# Allegro board 2019-09-22.brd
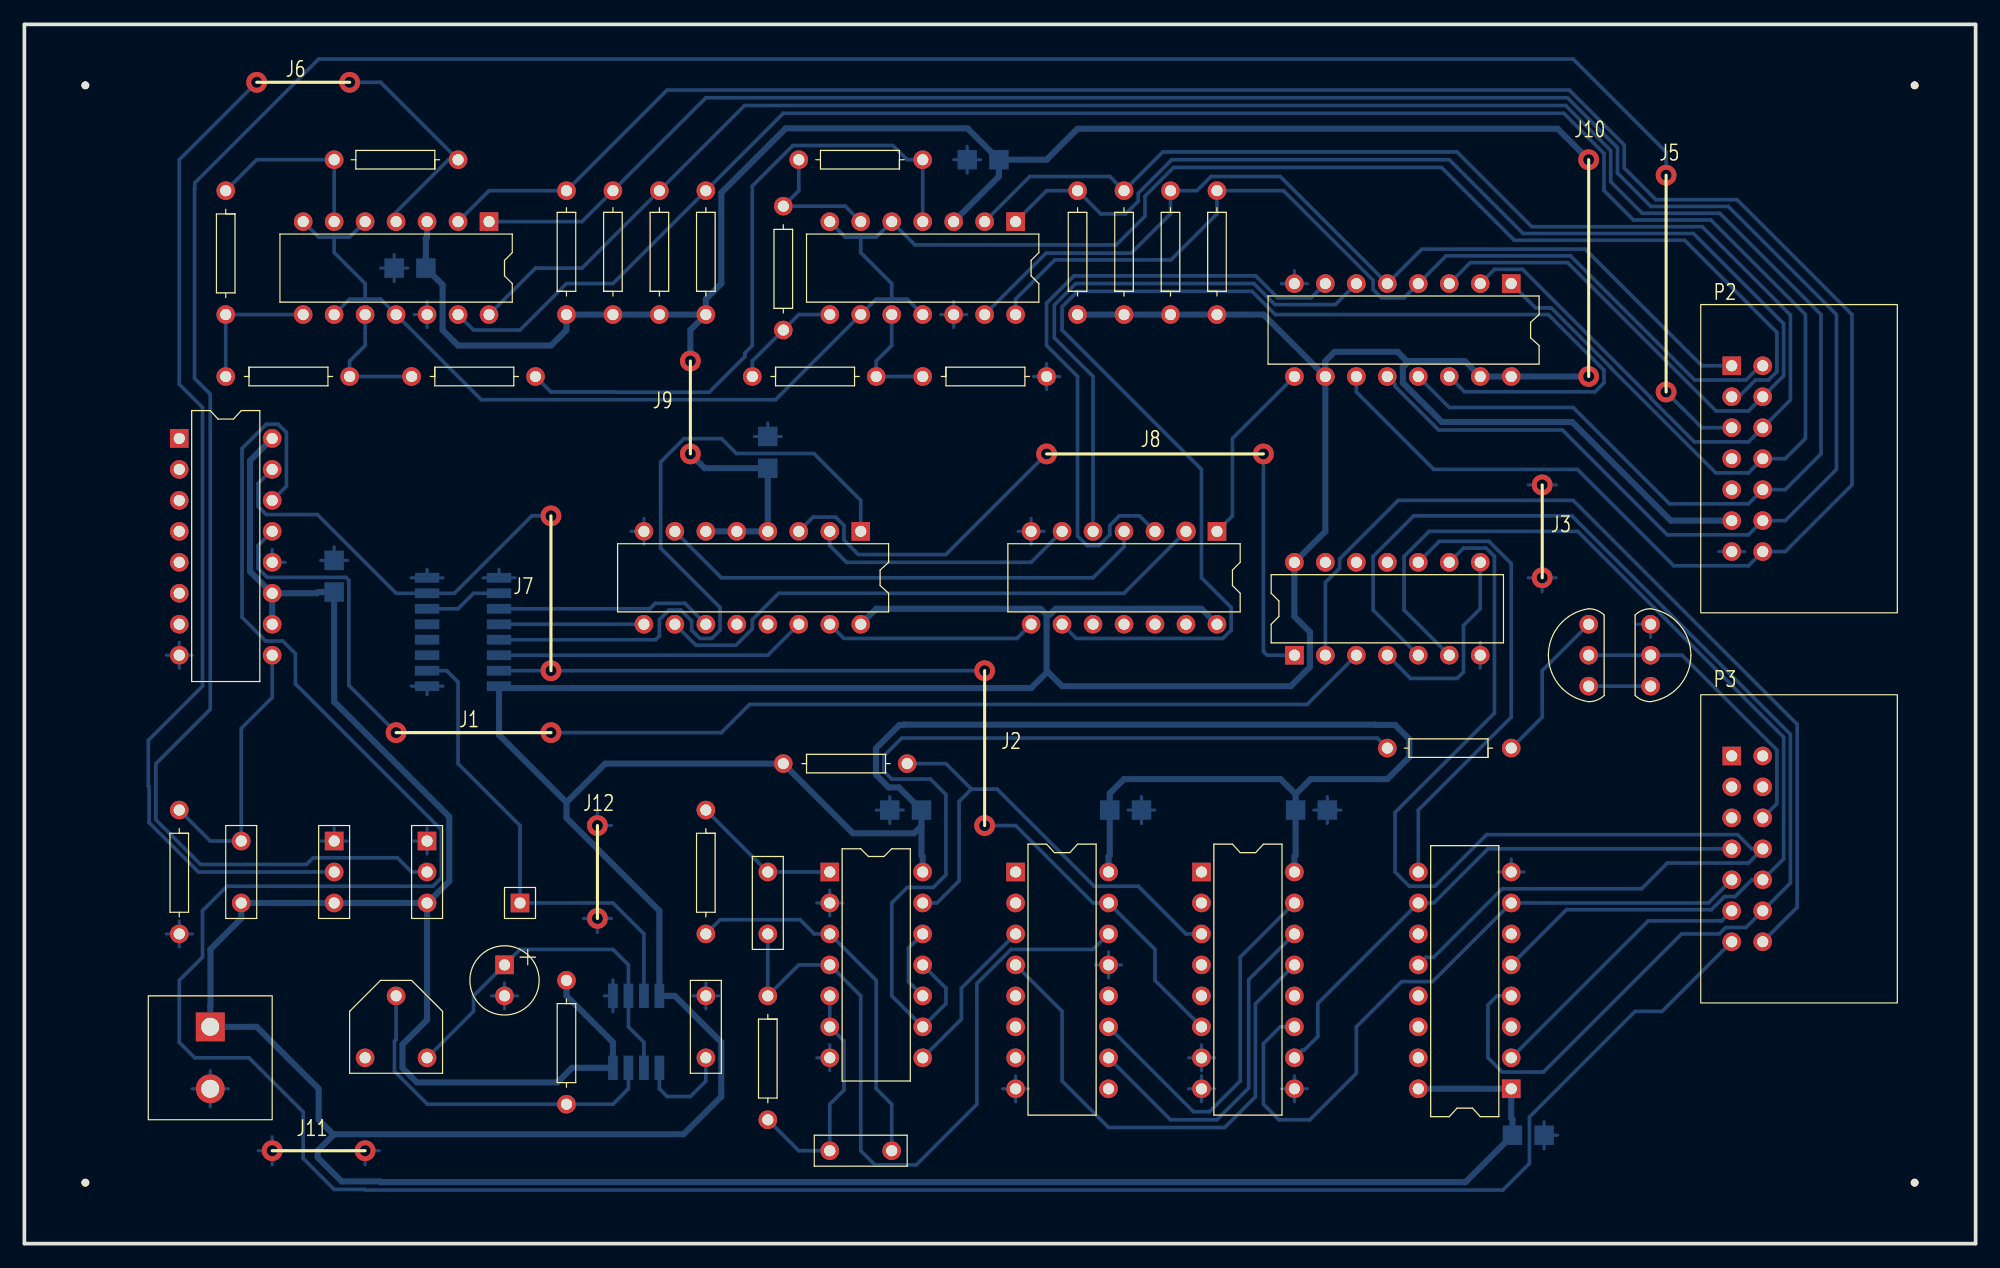
[diagram p0: board, top side]
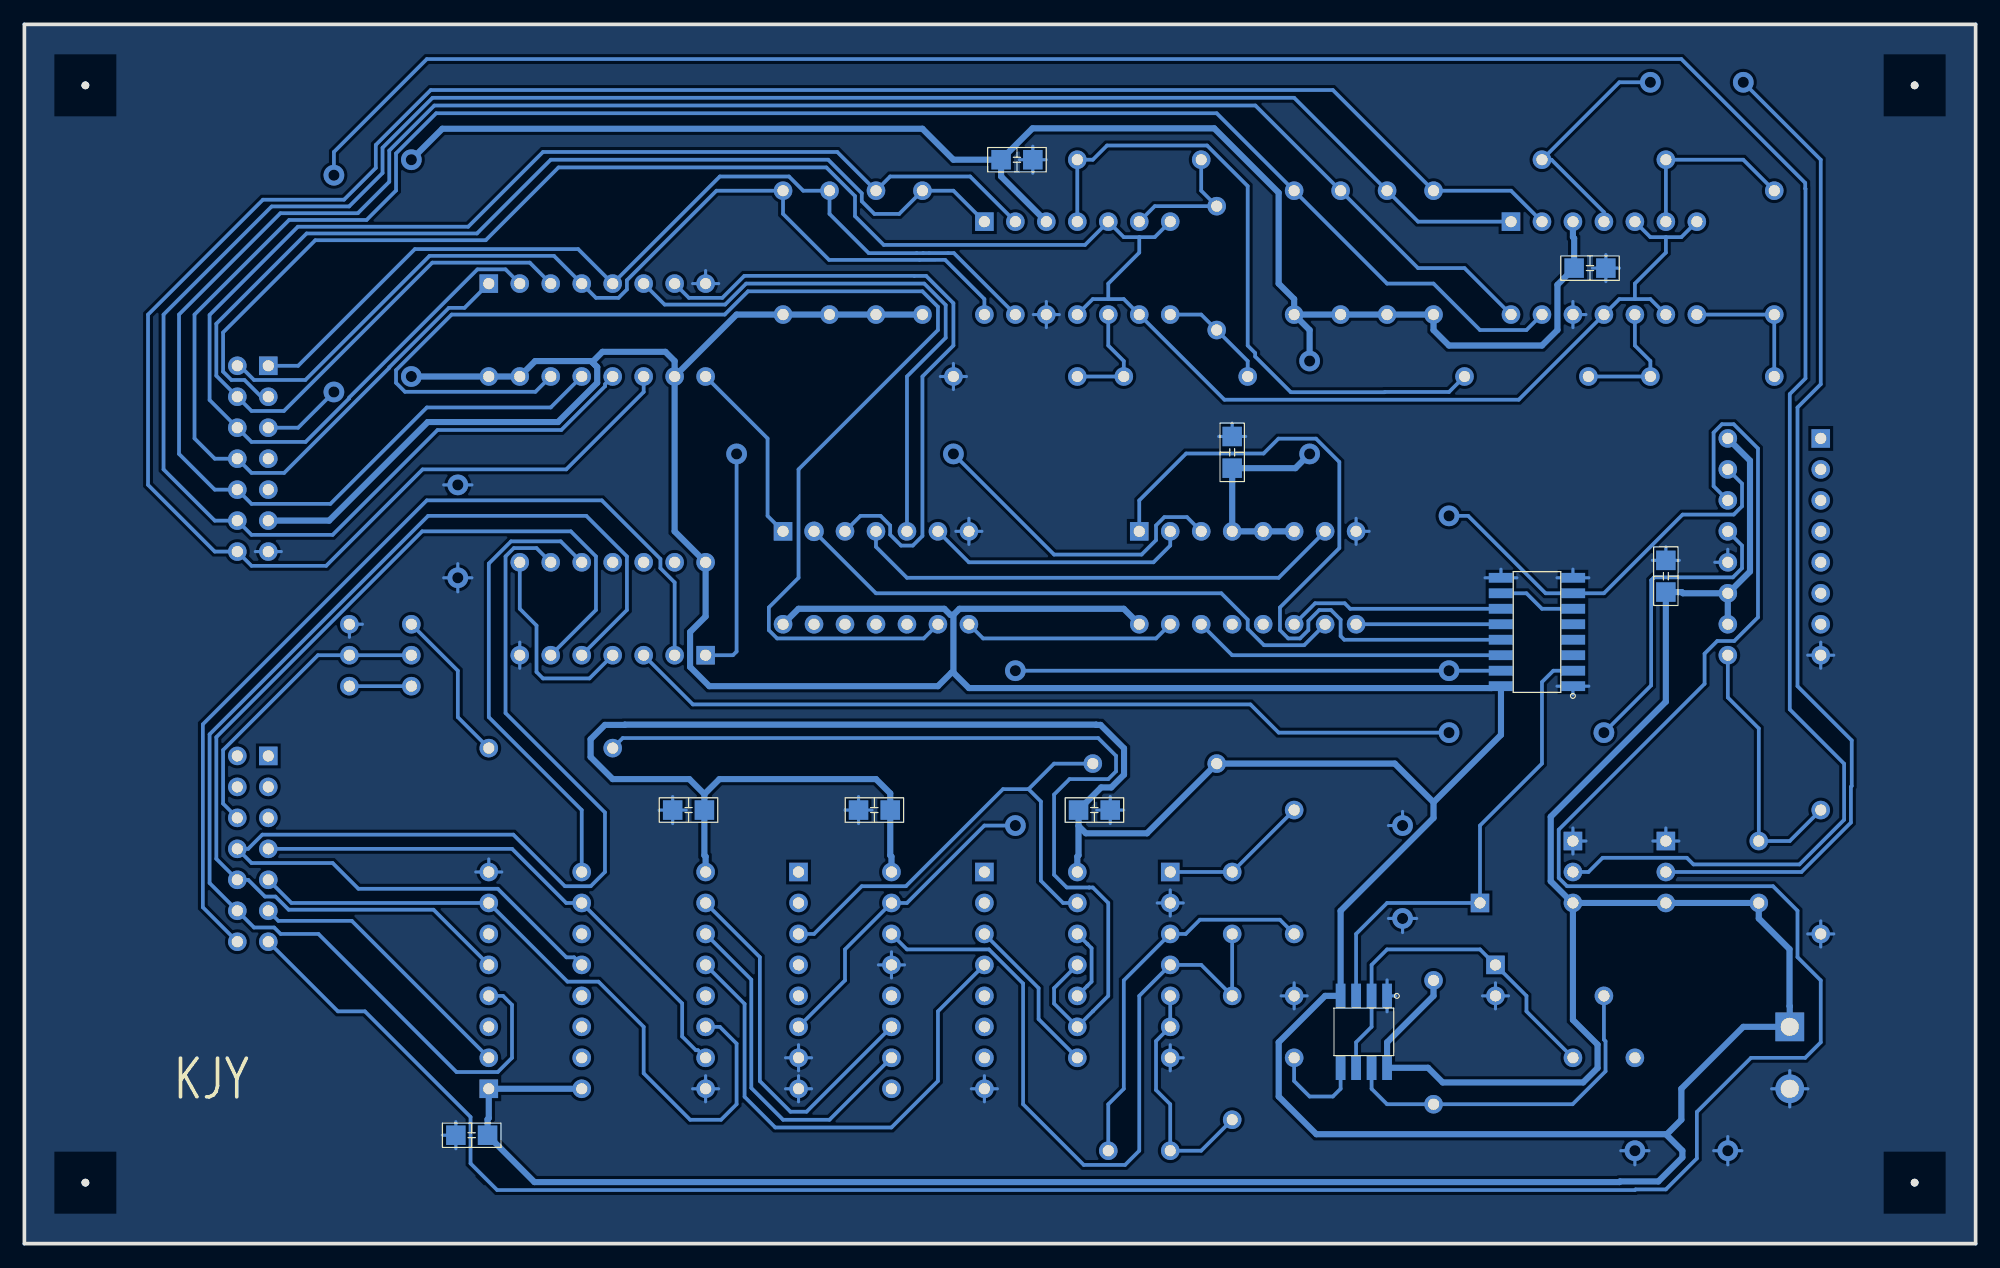
[diagram p1: board, bottom side, seen from below]

Outline 160 x 100 mm; copper layers: TOP, BOTTOM. Coordinates in mm from the lower left corner of the outline.
Outline path: 0,100 0,0 160,0 160,100 0,100

## Design rules (mm)
nets with their own width: min track width 0.5; nets +5V GND

## Placement (name value [footprint] x y rotation side)
C1  10uF  [CAP196]  39.37 22.86 0 top
C2  0.1uF  [CAP300]  55.88 15.24 90 top
C3  0.1uF  [CAP300]  17.78 27.94 90 top
C4  0.01uF  [CAP300]  60.96 30.48 270 top
C5  0.01uF  [CAP300]  71.12 7.62 180 top
C6  0.1uF  [SMDCAP]  33.02 80.01 180 bottom
C7  0.1uF  [SMDCAP]  80.01 88.9 180 bottom
C8  0.1uF  [SMDCAP]  60.96 63.5 90 bottom
C9  0.1uF  [SMDCAP]  25.4 53.34 90 bottom
C10  0.1uF  [SMDCAP]  73.66 35.56 180 bottom
C11  0.1uF  [SMDCAP]  88.9 35.56 0 bottom
C12  0.1uF  [SMDCAP]  104.14 35.56 0 bottom
C13  0.1uF  [SMDCAP]  121.92 8.89 0 bottom
J1  -  [JUMPER4]  30.48 41.91 180 bottom
J2  -  [JUMPER4]  78.74 46.99 90 bottom
J3  -  [JUMPER2]  124.46 54.61 270 bottom
J5  -  [JUMPER6]  134.62 69.85 270 bottom
J6  -  [JUMPER2]  19.05 95.25 180 bottom
J7  -  [JUMPER4]  43.18 46.99 270 bottom
J8  -  [JUMPER6]  101.6 64.77 0 bottom
J9  -  [JUMPER2]  54.61 64.77 270 bottom
J10  -  [JUMPER6]  128.27 71.12 270 bottom
J11  -  [JUMPER2]  27.94 7.62 0 bottom
J12  -  [JUMPER2]  46.99 26.67 270 bottom
NOREF  -  [unnamed]  155 95 0 top
NOREF#2  -  [#2]  0 0 0 top
NOREF#3  -  [unnamed]  5 95 0 top
NOREF#4  -  [#2]  0 0 90 top
NOREF#5  -  [unnamed]  5 5 0 top
NOREF#6  -  [unnamed]  155 5 0 top
P1  CON2  [POWER2]  15.24 17.78 270 top
P2  CON14  [JUMPER14]  140 72 270 top
P3  CON14  [JUMPER14]  140 40 270 top
Q1  2SC1815  [TO92]  128.27 45.72 90 top
Q2  2SC1815  [TO92]  133.35 50.8 270 top
R1  10K  [RES400]  44.45 21.59 180 top
R2  10K  [RES400]  35.56 88.9 90 top
R3  10K  [RES400]  16.51 86.36 180 top
R4  10K  [RES400]  16.51 71.12 270 top
R5  10K  [RES400]  31.75 71.12 270 top
R6  10K  [RES400]  73.66 88.9 90 top
R7  10K  [RES400]  62.23 85.09 180 top
R8  10K  [RES400]  59.69 71.12 270 top
R9  100  [RES400]  73.66 71.12 270 top
R10  4.7K  [RES400]  44.45 76.2 0 top
R11  4.7K  [RES400]  48.26 76.2 0 top
R12  4.7K  [RES400]  52.07 76.2 0 top
R13  4.7K  [RES400]  55.88 76.2 0 top
R14  4.7K  [RES400]  90.17 76.2 0 top
R15  4.7K  [RES400]  86.36 76.2 0 top
R16  4.7K  [RES400]  97.79 76.2 0 top
R17  4.7K  [RES400]  93.98 76.2 0 top
R18  680K  [RES400]  12.7 35.56 180 top
R19  10K  [RES400]  55.88 35.56 180 top
R20  10K  [RES400]  60.96 20.32 180 top
R21  10K  [RES400]  62.23 39.37 270 top
R22  1K  [RES400]  121.92 40.64 90 top
TP1  TP  [JUMPER1]  40.64 27.94 0 top
U1  NE555  [SOP8]  48.26 20.32 270 bottom
U2  LM339  [DIP14_3]  38.1 83.82 270 top
U3  LM339  [DIP14_3]  81.28 83.82 270 top
U4  40147  [DIP16_3]  121.92 78.74 270 top
U5  4069  [DIP14_3#2]  97.79 58.42 270 top
U6  4518  [SOP16]  33.02 45.72 0 bottom
U7  4585  [DIP16_3]  68.58 58.42 270 top
U8  4027  [DIP16_3]  12.7 66.04 0 top
U9  4071  [DIP14_3]  104.14 48.26 90 top
U10  4001  [DIP14_3]  66.04 30.48 0 top
U11  4017  [DIP16_3]  81.28 30.48 0 top
U12  4051  [DIP16_3]  96.52 30.48 0 top
U13  4175  [DIP16_3]  121.92 12.7 180 top
VR1  1M  [RESADJ]  33.02 15.24 270 top
VR2  10K  [JUMPER3]  25.4 33.02 270 top
VR3  10K  [JUMPER3]  33.02 33.02 270 top

## Library data of the parts
C1 = Cap Pol
C2-C5 = Cap NP: Tolerance: ***; User Part Number: ***
C6 = Cap TEXT_0
C7 = Cap TEXT_1
C8 = Cap TEXT_2
C9 = Cap TEXT_3
C10 = Cap TEXT_4
C11 = Cap TEXT_5
C12 = Cap TEXT_6
C13 = Cap TEXT_7
J1-J3 J5-J12 = JUMPER
P1 = CON2
P2 P3 = CON14: User Part Number: ***
Q1 Q2 = 2SC1815
R1-R22 = resistor: Tolerance: ***; User Part Number: ***
TP1 = TP: User Part Number: ***
U1 = NE555
U2 U3 = LM339: Tolerance: ***; User Part Number: ***
U4 = 40147: Tolerance: ***; User Part Number: ***
U5 = 4069: Tolerance: ***; User Part Number: ***
U6 = 4518
U7 = 4585: Tolerance: ***; User Part Number: ***
U8 = 4027_0: Tolerance: ***; User Part Number: ***
U9 = 4071: Tolerance: ***; User Part Number: ***
U10 = 4001: Tolerance: ***; User Part Number: ***
U11 = 4017: Tolerance: ***; User Part Number: ***
U12 = 4051: Tolerance: ***; User Part Number: ***
U13 = 4175: Tolerance: ***; User Part Number: ***
VR1 = VR1: Tolerance: ***; User Part Number: ***
VR2 VR3 = VR2: User Part Number: ***

## Footprints (pads in the part's own frame, mm; a bottom-side part is the same pattern mirrored in y, then rotated)
CAP196
  rect 1.524x1.524 hole 0.914: 1(0,0)
  round 1.524 hole 0.914: 2(0,-2.54)
CAP300
  round 1.524 hole 0.914: 1(0,0) 2(5.08,0)
DIP14_3
  rect 1.524x1.524 hole 0.914: 1(0,0)
  round 1.524 hole 0.914: 2(0,-2.54) 3(0,-5.08) 4(0,-7.62) 5(0,-10.16) 6(0,-12.7) 7(0,-15.24) 8(7.62,-15.24) 9(7.62,-12.7) 10(7.62,-10.16) 11(7.62,-7.62) 12(7.62,-5.08) 13(7.62,-2.54) 14(7.62,0)
DIP14_3#2
  rect 1.524x1.524 hole 0.914: 1(0,0)
  round 1.6 hole 0.91: 2(0,-2.54)
  round 1.524 hole 0.914: 3(0,-5.08) 4(0,-7.62) 5(0,-10.16) 6(0,-12.7) 7(0,-15.24) 8(7.62,-15.24) 9(7.62,-12.7) 10(7.62,-10.16) 11(7.62,-7.62) 12(7.62,-5.08) 13(7.62,-2.54) 14(7.62,0)
DIP16_3
  rect 1.524x1.524 hole 0.914: 1(0,0)
  round 1.524 hole 0.914: 2(0,-2.54) 3(0,-5.08) 4(0,-7.62) 5(0,-10.16) 6(0,-12.7) 7(0,-15.24) 8(0,-17.78) 9(7.62,-17.78) 10(7.62,-15.24) 11(7.62,-12.7) 12(7.62,-10.16) 13(7.62,-7.62) 14(7.62,-5.08) 15(7.62,-2.54) 16(7.62,0)
JUMPER1
  rect 1.524x1.524 hole 0.914: 1(0,0)
JUMPER3
  rect 1.524x1.524 hole 0.914: 1(0,0)
  round 1.524 hole 0.914: 2(2.54,0) 3(5.08,0)
JUMPER14
  rect 1.524x1.524 hole 0.914: 1(0,0)
  round 1.524 hole 0.914: 2(0,2.54) 3(2.54,0) 4(2.54,2.54) 5(5.08,0) 6(5.08,2.54) 7(7.62,0) 8(7.62,2.54) 9(10.16,0) 10(10.16,2.54) 11(12.7,0) 12(12.7,2.54) 13(15.24,0) 14(15.24,2.54)
POWER2
  rect 2.362x2.362 hole 1.473: 1(0,0)
  round 2.362 hole 1.473: 2(5.08,0)
RES400
  round 1.524 hole 0.914: 1(0,0) 2(0,10.16)
RESADJ
  round 1.524 hole 0.914: 1(0,0) 2(-5.08,-2.54) 3(0,-5.08)
SMDCAP
  rect 1.6x1.6 smd: 1(0.1,0) 2(2.7,0)
SOP8
  rect 2x0.8 smd: 1(0,0) 2(0,-1.27) 3(0,-2.54) 4(0,-3.81) 5(5.9,-3.81) 6(5.9,-2.54) 7(5.9,-1.27) 8(5.9,0)
SOP16
  rect 2x0.8 smd: 1(0,0) 2(0,-1.27) 3(0,-2.54) 4(0,-3.81) 5(0,-5.08) 6(0,-6.35) 7(0,-7.62) 8(0,-8.89) 9(5.9,-8.89) 10(5.9,-7.62) 11(5.9,-6.35) 12(5.9,-5.08) 13(5.9,-3.81) 14(5.9,-2.54) 15(5.9,-1.27) 16(5.9,0)
TO92
  round 1.524 hole 0.914: 1(0,0) 2(2.54,0) 3(5.08,0)
unnamed
  round 0.635 hole 3 unplated: (0,0)

## Nets
+5V: C3.1 C6.1 C7.1 C8.1 C9.1 C10.1 C11.1 C12.1 C13.1 P1.1 P2.11 R1.1 R10.1 R11.1 R12.1 R13.1 R14.1 R15.1 R16.1 R17.1 R21.1 U1.4(RST) U1.8(VCC) U2.3 U3.3 U4.10(I\9\) U4.15(I\0\) U4.16(VCC) U5.14 U6.16 U7.4(A>BIN) U7.5(A<BIN) U7.6(A=BIN) U7.16(VCC) U8.10(J) U8.11(K) U8.16 U9.14 U10.14 U11.16(VCC) U12.16(VCC) U13.1(R\S\T\) U13.16(VCC) VR2.3(A) VR3.3(A)
GND: C1.2 C2.2 C6.2 C7.2 C8.2 C9.2 C10.2 C11.2 C12.2 C13.2 P1.2 P2.13 Q2.1(B) R9.2 R18.2 U1.1(GND) U2.12 U3.12 U4.8(GND) U5.7 U6.1(CLK) U6.8 U6.9(CLK) U7.8(GND) U8.8 U8.12(RST) U9.7 U10.2(I1) U10.7 U11.8(GND) U11.13(C\K\E\N\) U12.7(VEE) U12.8(GND) U12.9(C) U13.8(GND) VR2.1(WIPER) VR3.1(WIPER)
AD0: P2.14 R10.2 U2.2(OUT) U4.11(I\1\)
AD1: P2.12 R11.2 U2.1(OUT) U4.12(I\2\)
AD2: P2.10 R12.2 U2.14(OUT) U4.13(I\3\)
AD3: P2.8 R13.2 U2.13(OUT) U4.1(I\4\)
AD4: P2.6 R14.2 U3.2(OUT) U4.2(I\5\)
AD5: P2.4 R15.2 U3.1(OUT) U4.3(I\6\)
AD6: P2.2 R16.2 U3.14(OUT) U4.4(I\7\)
AD7: P2.1 R17.2 U3.13(OUT) U4.5(I\8\)
CLK: TP1.1 U1.3(OUT) U6.2(EN)
MOTOR-GND: P3.6 Q1.2(C) Q2.2(C)
MR: U6.7(CLR) U6.15(CLR) U8.15(Q) U11.15(RST) U12.6(E\N\)
MR2: P3.13 U8.14(Q\)
SW1: P3.14 U9.2(I1)
SW2: P3.12 U9.5(I0) U13.4(D0)
SW3: P3.10 U9.6(I1) U13.5(D1)
SW4: P3.8 U9.9(I1) U13.12(D2)
SWLED1: P3.11 U13.2(Q0)
SWLED2: P3.9 U12.11(A) U13.7(Q1)
SWLED3: P3.7 U12.10(B) U13.10(Q2)
VR3: P2.5 VR3.2(B)
VR-LED: P2.3 U2.5(+IN) U2.7(+IN) U2.9(+IN) U2.11(+IN) U3.5(+IN) U3.7(+IN) U3.9(+IN) U3.11(+IN)
N01111: R2.2 R3.1 U2.6(-IN)
N01115: R2.1 U2.4(-IN) VR2.2(B)
N01154: R3.2 R4.1 U2.8(-IN)
N01241: R4.2 R5.1 U2.10(-IN)
N01315: R5.2 R6.1 U3.4(-IN)
N01389: R6.2 R7.1 U3.6(-IN)
N01463: R7.2 R8.1 U3.8(-IN)
N01537: R8.2 R9.1 U3.10(-IN)
N03199: U4.9(A\) U5.1(I)
N03203: U4.7(B\) U5.3(I)
N03218: U4.6(C\) U5.5(I)
N03230: U4.14(D\) U5.9(I)
N03242: U5.8(O) U7.15(A3)
N03249: U5.6(O) U7.2(A2)
N03261: U5.4(O) U7.7(A1)
N03273: U5.2(O) U7.10(A0)
N03297: U6.11(Q0) U7.11(B0)
N03299: U6.12(Q1) U7.9(B1)
N03301: U6.13(Q2) U7.1(B2)
N03303: U6.14(Q3) U7.14(B3)
N03321: U6.6(Q3) U6.10(EN)
N03552: C3.2 R18.1 U8.9(SET)
N03574: U7.3(A=BOUT) U9.1(I0)
N03611: R1.2 U1.7(DISC) VR1.2
N03615: C1.1 U1.2(TRIG) U1.6(THR) VR1.1
N03657: C2.1 U1.5(CV)
N03771: U8.13(CLK) U9.3(O)
N13764: C5.1 R19.2 U10.3(O)
N13778: C5.2 R20.2 U10.5(I0) U10.6(I1)
N13892: C4.1 R19.1 U10.1(I0)
N13899: C4.2 R20.1 U10.4(O) U11.14(CLK)
N14066: U9.4(O) U9.8(I0)
N14070: U9.10(O) U13.9(CLK)
N14098: U10.8(I0) U11.3(0)
N14122: U11.4(2) U12.13(X0)
N14134: U11.10(4) U12.14(X1)
N14146: U11.11(9) U12.15(X2)
N14213: R21.2 U10.13(I1) U12.3(X)
N14272: U10.10(O) U10.12(I0)
N14287: R22.2 U10.9(I1) U10.11(O)
N14409: Q1.3(E) R22.1
N14422: Q1.1(B) Q2.3(E)

Pads without a net: P2 7 9; P3 1 2 3 4 5; U5 10 11 12 13; U6 3 4 5; U7 12 13; U8 1 2 3 4 5 6 7; U9 11 12 13; U11 1 2 5 6 7 9 12; U12 1 2 4 5 12; U13 3 6 11 13 14 15; VR1 3

## Via types
v1: diameter 1.7, hole 0.91, TOP to BOTTOM, 22 vias

## Routing (per net, layer and track width the routed paths; a pad name or vN(x,y) marks a point on that pad's centre or on a via; arc(x,y) is an arc through that point)
+5V: length 814.1
  BOTTOM w0.5: 44.45,36.2 47.62,39.37 R21.1 67.94,33.66 72.96,33.66 73.56,34.26 ; 44.45,36.2 44.45,34.91 52.07,27.3 U1.4 53.34,20.32 57.15,16.51 57.15,12.06 54.06,8.97 25.4,8.97 ; 44.45,36.2 38.92,41.73 U6.16 39.52,45.72 39.67,45.57 82.55,45.57 83.82,46.84 ; 73.56,34.26 C10.1 71.7,37.41 70.88,37.41 69.83,38.47 69.83,40.62 71.75,42.55 72.1,42.55 72.12,42.56 110.76,42.56 110.78,42.55 112.39,42.55 113.57,41.37 113.57,39.91 111.76,38.1 105.48,38.1 104.24,36.86 ; 73.56,34.26 73.56,31.85 73.66,31.75 U10.14 ; 113.03,71.89 113.03,70.6 116.24,67.39 126.92,67.39 135.01,59.3 P2.11 ; 113.03,71.89 113.53,72.39 118.11,72.39 U4.15 U4.16 v1(128.27,71.12) ; 113.03,71.89 113.44,72.3 112.59,73.14 107.44,73.14 106.68,72.39 U4.10 ; 83.82,51.57 83.82,46.84 ; 83.82,51.57 84.07,51.57 84.56,52.07 96.52,52.07 U5.14 ; 83.82,51.57 83.32,52.07 69.85,52.07 U7.16 ; 83.82,46.84 83.97,46.84 85.09,45.72 103.84,45.72 105.41,47.3 105.41,50.16 104.14,51.44 U9.14 106.68,58.42 U4.10 ; R13.1 R12.1 R11.1 R10.1 44.45,74.93 43.18,73.66 35.56,73.66 34.29,74.93 34.29,78.64 C6.1 32.92,82.45 33.02,82.55 U2.3 ; R13.1 54.61,74.93 v1(54.61,72.39) ; R13.1 55.88,77.47 57.15,78.74 57.15,86.19 62.43,91.47 77.34,91.47 C7.1 ; U4.10 101.6,76.2 R16.1 R17.1 R14.1 R15.1 ; VR3.3 33.02,18.35 31,16.33 31,14.4 32.18,13.22 43.7,13.22 44.9,14.42 U1.8 48.26,16.51 44.45,20.32 R1.1 ; VR3.3 33.05,27.94 34.84,29.73 34.84,35.01 25.4,44.45 C9.1 24.1,53.44 24,53.34 U8.11 ; VR3.3 VR2.3 C3.1 17.78,26.67 15.26,24.15 15.26,19.48 15.24,19.46 P1.1 19.05,17.78 24.13,12.7 24.13,10.16 25.32,8.97 25.4,8.97 ; 25.4,8.97 24.05,7.62 24.05,7.07 26.02,5.1 29.16,5.1 29.21,5.05 118.18,5.05 C13.1 122.02,10.19 121.92,10.29 U13.1 U13.16 ; v1(128.27,88.9) 125.73,91.44 86.36,91.44 83.82,88.9 C7.1 ; v1(54.61,64.77) 55.78,63.6 C8.1 U7.4 U7.5 U7.6 ; U3.3 79.91,87.53 C7.1 ; U8.16 18.5,64.22 18.5,55.13 20.29,53.34 U8.11 ; U12.16 104.14,31.75 104.24,31.85 C12.1 104.24,36.86 ; U8.11 U8.10 ; 104.24,36.86 103,38.1 90.17,38.1 89,36.93 C11.1 89,31.85 88.9,31.75 U11.16
GND: length 158.8
  BOTTOM w0.254: 96.52,11.63 U12.8 ; U12.8 97.59,12.7 ; U12.8 95.45,12.7 ; U12.8 96.52,13.77 ; R18.2 13.77,25.4 ; R18.2 11.63,25.4 ; R18.2 12.7,26.47 ; R18.2 12.7,24.33 ; 64.97,15.24 U10.7 ; U10.7 66.04,14.17 ; U10.7 66.04,16.31 ; 141.07,56.76 P2.13 138.93,56.76 ; U6.1 34.33,45.72 ; U6.1 33.02,45.01 ; U6.1 31.71,45.72 ; 54.81,20.32 C2.2 ; C2.2 55.88,21.39 ; C2.2 55.88,19.25 ; C2.2 56.95,20.32 ; 75.13,76.2 U3.12 ; U3.12 76.2,75.13 ; U3.12 76.2,77.27 ; U3.12 77.27,76.2 ; 50.8,57.35 U7.8 ; U7.8 50.8,59.49 ; U7.8 49.73,58.42 ; 82.75,71.12 R9.2 ; R9.2 83.82,70.05 ; R9.2 83.82,72.19 ; R9.2 84.89,71.12 ; 11.63,48.26 U8.8 ; U8.8 12.7,47.19 ; U8.8 12.7,49.33 ; U8.8 13.77,48.26 ; 13.75,12.7 P1.2 ; P1.2 16.73,12.7 ; P1.2 15.24,11.21 ; P1.2 15.24,14.19 ; C11.2 92.71,35.56 ; C11.2 91.6,34.45 ; C11.2 91.6,36.67 ; C11.2 90.49,35.56 ; 27.94,6.46 v1(27.94,7.62) ; v1(27.94,7.62) 29.1,7.62 ; v1(27.94,7.62) 26.78,7.62 ; U2.12 33.02,77.27 ; U2.12 31.95,76.2 ; U2.12 33.02,75.13 ; C13.2 124.62,10 ; C13.2 124.62,7.78 ; C13.2 125.73,8.89 ; 38.3,20.32 C1.2 ; C1.2 40.44,20.32 ; C1.2 39.37,19.25 ; C1.2 39.37,21.39 ; C6.2 30.32,81.12 ; C6.2 29.21,80.01 ; C6.2 30.32,78.9 ; C6.2 31.43,80.01 ; 24.33,33.02 VR2.1 ; VR2.1 25.4,34.09 ; VR2.1 26.47,33.02 ; 31.71,54.61 U6.8 ; U6.8 34.33,54.61 ; U6.8 33.02,55.32 ; 119.38,47.19 U9.7 119.38,49.33 ; 81.28,11.63 U11.8 ; U11.8 81.28,13.77 ; U11.8 82.35,12.7 ; U11.8 80.21,12.7 ; U13.8 121.92,31.55 ; U13.8 120.85,30.48 ; U13.8 122.99,30.48 ; 70.96,34.45 C10.2 ; C10.2 72.07,35.56 ; C10.2 70.96,36.67 ; C10.2 69.85,35.56 ; 88.9,21.79 U11.13 ; U11.13 89.97,22.86 ; U11.13 87.83,22.86 ; U11.13 88.9,23.93 ; 66.04,26.87 U10.2 ; U10.2 66.04,29.01 ; U10.2 67.11,27.94 ; U10.2 64.97,27.94 ; 95.45,15.24 U12.7 ; U12.7 97.59,15.24 ; U12.7 96.52,16.31 ; U12.7 96.52,14.17 ; 103.07,78.74 U4.8 ; U4.8 105.21,78.74 ; U4.8 104.14,79.81 ; C12.2 107.95,35.56 ; C12.2 105.73,35.56 ; C12.2 106.84,34.45 ; C12.2 106.84,36.67 ; v1(20.32,7.62) 21.48,7.62 ; v1(20.32,7.62) 19.16,7.62 ; v1(20.32,7.62) 20.32,6.46 ; v1(20.32,7.62) 20.32,8.78 ; 76.2,88.9 C7.2 ; C7.2 77.31,90.01 ; C7.2 78.42,88.9 ; C7.2 77.31,87.79 ; C8.2 62.07,66.2 ; C8.2 59.85,66.2 ; C8.2 60.96,67.31 ; v1(124.46,54.61) 125.62,54.61 ; v1(124.46,54.61) 124.46,55.77 ; v1(124.46,54.61) 124.46,53.45 ; v1(124.46,54.61) 123.3,54.61 ; VR3.1 33.02,34.09 ; VR3.1 33.02,31.95 ; VR3.1 31.95,33.02 ; 21.39,55.88 U8.12 20.32,56.95 ; U12.9 104.14,13.77 ; U12.9 104.14,11.63 ; U12.9 105.21,12.7 ; U12.9 103.07,12.7 ; 46.99,25.51 v1(46.99,26.67) ; v1(46.99,26.67) 45.83,26.67 ; v1(46.99,26.67) 48.15,26.67 ; U6.9 38.92,55.32 ; U6.9 37.61,54.61 ; U6.9 40.23,54.61 ; 48.26,19.01 U1.1 ; U1.1 48.26,21.63 ; U1.1 47.55,20.32 ; C9.2 25.4,57.15 ; C9.2 26.51,56.04 ; C9.2 24.29,56.04 ; 82.55,57.35 U5.7 ; U5.7 82.55,59.49 ; U5.7 83.62,58.42 ; U5.7 81.48,58.42 ; 48.15,34.29 v1(46.99,34.29) 46.99,35.45 ; 123.3,62.23 v1(124.46,62.23) 125.62,62.23 ; 133.35,49.73 Q2.1 132.28,50.8
AD0: length 192
  BOTTOM w0.3: U2.2 38.1,86.36 R10.2 52.7,94.61 126.68,94.61 131.19,90.11 131.19,88.22 133.79,85.62 140.44,85.62 149.86,76.2 149.86,62.23 144.39,56.76 P2.14 141.37,55.59 135.25,55.59 127.34,63.5 115.57,63.5 109.22,69.85 U4.11
AD1: length 180.5
  BOTTOM w0.3: U2.1 45.72,83.82 R11.2 55.88,93.98 126.53,93.98 130.63,89.88 130.63,87.81 133.37,85.07 139.72,85.07 148.59,76.2 148.59,63.5 144.39,59.3 P2.12 141.37,58.13 134.72,58.13 126.12,66.73 115.97,66.73 112.38,70.32 112.38,70.5 U4.12
AD2: length 175.4
  BOTTOM w0.3: U4.13 116.84,68.58 127,68.58 134.91,60.67 141.37,60.67 P2.10 144.39,61.84 147.32,64.77 147.32,76.2 139.01,84.51 132.66,84.51 130.08,87.09 130.08,89.65 126.38,93.34 59.05,93.34 R12.2 45.72,80.01 41.91,80.01 U2.14
AD3: length 168.9
  BOTTOM w0.3: U2.13 36.83,74.93 40.64,74.93 44.45,78.74 48.26,78.74 R13.2 62.23,92.71 126.23,92.71 129.52,89.42 129.52,86.38 131.94,83.96 138.29,83.96 146.05,76.2 146.05,66.04 144.39,64.38 P2.8 141.37,63.21 138.7,63.21 130.08,71.83 130.08,71.87 125.19,76.75 123.91,76.75 U4.1
AD4: length 115.2
  BOTTOM w0.3: U3.2 82.45,87.53 89,87.53 R14.2 93.34,89.53 117.47,89.53 123.6,83.41 137.58,83.41 144.81,76.17 144.81,69.19 P2.6 141.37,65.75 136.94,65.75 133.37,69.33 133.37,69.39 122.85,79.91 120.55,79.91 U4.2
AD5: length 111.3
  BOTTOM w0.3: U4.3 118.56,80.46 126.55,80.46 138.72,68.29 141.37,68.29 P2.4 144.26,71.18 144.26,75.45 136.86,82.85 122.89,82.85 116.84,88.9 94.09,88.9 91.34,86.15 91.34,85.49 90.3,84.45 88.27,84.45 R15.2 83.82,86.36 U3.1
AD6: length 77.5
  BOTTOM w0.3: U3.14 81.28,77.47 84.5,80.69 86.6,80.68 94.02,80.68 97.79,84.46 R16.2 103.25,86.36 110.59,79.02 110.59,78.26 111.28,77.57 113.13,77.57 U4.4 116.57,81.01 126.78,81.01 136.96,70.83 141.17,70.83 142.01,71.67 142.22,71.67 P2.2
AD7: length 75.8
  BOTTOM w0.3: U3.13 83.78,81.24 84.27,81.24 85.81,81.24 86.29,81.24 86.32,81.24 86.83,81.24 86.83,81.24 90.76,81.24 93.98,84.45 R17.2 96.14,86.36 97.31,87.53 102.97,87.53 U4.5 114.59,81.57 127.98,81.57 137.55,72 P2.1
CLK: length 39.4
  BOTTOM w0.3: U1.3 50.8,25.4 48.26,27.94 TP1.1 40.64,34.29 35.56,39.37 35.56,46.05 34.62,46.99 U6.2
MOTOR-GND: length 24.7
  BOTTOM w0.3: P3.6 143.71,36.09 143.71,40.48 135.93,48.26 Q2.2 Q1.2
MR: length 99
  BOTTOM w0.3: U8.15 19.15,62.33 19.15,60.48 19.84,59.79 24.03,59.79 30.48,53.34 U6.7 35.26,53.34 41.61,59.69 v1(43.18,59.69) ; v1(78.74,34.29) 81.28,34.29 87.63,27.94 U11.15 92.71,24.13 92.71,21.59 U12.6 ; U6.15 v1(43.18,46.99) v1(78.74,46.99)
MR2: length 231.1
  BOTTOM w0.3: P3.13 134.29,19.05 132.08,19.05 123.42,10.39 123.42,6.58 121.23,4.39 27.94,4.39 27.89,4.45 25.4,4.45 22.86,6.99 22.86,10.79 18.41,15.24 13.97,15.24 12.7,16.51 12.7,21.59 14.61,23.5 14.61,27.31 16.61,29.31 33.5,29.31 34.19,30 34.19,33.95 22.23,45.91 22.23,48.39 21.19,49.43 19.79,49.43 17.85,51.37 17.85,65.22 19.84,67.21 20.8,67.21 21.49,66.52 21.49,62.13 U8.14
SW1: length 74.5
  BOTTOM w0.3: U9.2 106.68,54.23 107.85,55.4 107.85,56.16 112.65,60.96 127,60.96 145.37,42.59 145.37,27.59 P3.14
SW2: length 103.1
  BOTTOM w0.3: U13.4 120.75,20.32 120.02,19.58 120.02,15.24 121.18,14.07 124.56,14.07 135.89,25.4 138.99,25.4 139.52,25.93 141.17,25.93 P3.12 144.81,29.57 144.81,41.77 126.89,59.69 113.92,59.69 110.59,56.36 110.59,51.97 U9.5
SW3: length 84.5
  BOTTOM w0.3: U13.5 126.45,27.39 138.33,27.39 139.41,28.47 140.28,28.47 141.65,29.84 P3.10 144.26,31.56 144.26,41.54 127.38,58.42 115.19,58.42 113.13,56.36 113.13,51.97 U9.6
SW4: length 98.8
  BOTTOM w0.3: U9.9 118.01,57.05 119.86,57.05 120.55,56.36 120.55,43.52 112.39,35.36 112.39,30.48 113.56,29.31 115.67,29.31 119.91,33.55 140.48,33.55 141.65,32.38 P3.8 141.37,31.21 134.72,31.21 132.61,29.11 121.18,29.11 115.56,23.48 114.92,23.48 U13.12
SWLED1: length 23.1
  BOTTOM w0.3: U13.2 133.16,26.48 139.18,26.48 P3.11
SWLED2: length 57.4
  BOTTOM w0.3: U12.11 102.97,17.78 101.6,16.41 101.6,11.43 102.87,10.16 105.41,10.16 109.22,13.97 109.22,17.78 112.92,21.49 115.47,21.49 U13.7 138.1,27.94 P3.9
SWLED3: length 44.6
  BOTTOM w0.3: U12.10 104.76,15.86 104.94,15.86 106.06,16.98 106.06,19.7 U13.10 115.57,27.94 120.01,32.38 P3.7
VR3: length 215.6
  BOTTOM w0.3: VR3.2 31.75,30.48 30.58,31.65 23.68,31.65 23.14,31.1 14.44,31.1 10.78,34.76 10.78,39.36 15.24,43.82 15.24,69.67 13.95,70.96 13.95,86.52 13.97,86.54 13.97,87 24.13,97.16 127,97.16 134.62,89.53 v1(134.62,87.63) ; P2.5 137.55,66.92 v1(134.62,69.85)
VR-LED: length 171
  BOTTOM w0.3: 68.58,82.55 69.85,82.55 U3.5 73.03,81.92 89.53,81.92 91.89,84.27 91.89,85.92 94.24,88.27 116.2,88.27 122.17,82.3 136.14,82.3 143.71,74.73 143.71,71.52 143.02,70.83 141.95,70.83 140.58,69.46 P2.3 ; 68.58,82.55 67.31,82.55 U3.7 ; 68.58,82.55 68.58,81.28 71.12,78.74 71.12,77.47 ; 71.12,77.47 72.39,77.47 U3.11 ; 71.12,77.47 69.85,77.47 U3.9 61.59,69.22 37.47,69.22 U2.11 29.21,77.47 27.94,77.47 ; 27.94,77.47 27.94,78.74 25.4,81.28 25.4,82.55 ; 27.94,77.47 26.67,77.47 U2.9 ; 25.4,82.55 24.13,82.55 U2.7 ; 25.4,82.55 26.67,82.55 U2.5
N01111: length 15
  BOTTOM w0.3: U2.6 R2.2 19.05,88.9 R3.1
N01115: length 102
  BOTTOM w0.3: v1(19.05,95.25) 12.7,88.9 12.7,70.48 14.61,68.58 14.61,45.72 10.16,41.27 10.16,37.53 10.23,37.47 10.23,34.53 14.28,30.48 VR2.2 ; v1(26.67,95.25) 29.21,95.25 R2.1 34.78,88.9 30.48,84.6 U2.4
N01154: length 11.4
  BOTTOM w0.3: R4.1 R3.2 U2.8
N01241: length 10.7
  BOTTOM w0.3: U2.10 27.94,73.66 26.67,72.39 R4.2 R5.1
N01315: length 54.1
  BOTTOM w0.3: U3.4 R6.1 72.39,88.9 71.22,90.07 63.02,90.07 59.69,86.74 59.69,73.66 59.07,73.04 59.07,72.75 56.15,69.83 48.45,69.83 48.44,69.85 43.18,69.85 R5.2
N01389: length 11.2
  BOTTOM w0.3: U3.6 67.31,85.09 R7.1 63.5,86.36 R6.2
N01463: length 9.2
  BOTTOM w0.3: R8.1 59.69,72.39 R7.2 63.5,76.2 U3.8
N01537: length 9.4
  BOTTOM w0.3: R9.1 R8.2 69.85,72.39 71.12,73.66 U3.10
N03199: length 15.3
  BOTTOM w0.3: U4.9 99.06,66.04 99.06,59.69 U5.1
N03203: length 53.8
  BOTTOM w0.3: U5.3 91.44,59.69 89.79,59.69 89,58.9 89,58.15 88.11,57.25 87.15,57.25 86.36,58.04 86.36,71.12 83.82,73.66 83.82,77.13 86.06,79.37 87.03,79.37 87.03,79.38 100.97,79.38 102.77,77.57 105.51,77.57 U4.7
N03218: length 46.8
  BOTTOM w0.3: U5.5 87.63,71.12 84.45,74.3 84.45,76.98 86.21,78.74 100.82,78.74 102.54,77.02 107.5,77.02 U4.6
N03230: length 109.1
  BOTTOM w0.3: U4.14 118.09,69.87 128.79,69.87 129.52,70.6 129.52,71.64 124.96,76.2 102.57,76.2 100.67,78.11 86.36,78.11 85.09,76.84 85.09,74.93 96.52,63.5 96.52,54.61 98.96,52.17 98.96,50.32 98.27,49.63 86.26,49.63 U5.9
N03242: length 17.5
  BOTTOM w0.3: U7.15 67.21,49.63 81.38,49.63 U5.8
N03249: length 21.8
  BOTTOM w0.3: U5.6 82.55,55.88 67.41,55.88 66.04,57.25 U7.2
N03261: length 40.7
  BOTTOM w0.3: U7.7 57.15,54.61 87.63,54.61 90.17,57.15 U5.4
N03273: length 46.9
  BOTTOM w0.3: U7.10 55.06,49.08 58.35,49.08 59.69,50.42 59.69,51.18 61.85,53.34 90.17,53.34 U5.2
N03297: length 17.9
  BOTTOM w0.3: U7.11 54.16,52.52 51.74,52.52 51.29,52.07 U6.11
N03299: length 11.9
  BOTTOM w0.3: U7.9 U6.12
N03301: length 59.3
  BOTTOM w0.3: U7.1 68.58,60.96 64.74,64.8 58.39,64.8 57.17,66.02 54.09,66.02 52.17,64.11 52.17,57.05 57.05,52.17 57.05,50.32 56.36,49.63 55.4,49.63 54.71,50.32 54.71,51.08 53.82,51.97 52.86,51.97 52.07,51.18 52.07,49.83 51.77,49.53 U6.13
N03303: length 25.6
  BOTTOM w0.3: U7.14 60.96,48.26 U6.14
N03321: length 6.4
  BOTTOM w0.3: U6.10 36.83,53.34 35.56,52.07 U6.6
N03552: length 22.4
  BOTTOM w0.3: R18.1 15.24,33.02 C3.2 17.78,42.26 20.32,44.8 U8.9
N03574: length 45.1
  BOTTOM w0.3: U7.3 64.67,59.59 66.52,59.59 67.21,58.9 67.21,57.7 68.39,56.52 75.56,56.52 v1(83.82,64.77) ; v1(101.6,64.77) 101.6,48.56 101.9,48.26 U9.1
N03611: length 28.8
  BOTTOM w0.3: VR1.2 30.48,16.73 30.35,16.6 30.35,14.13 33.05,11.43 R1.2 48.26,11.43 49.53,12.7 U1.7
N03615: length 30.4
  BOTTOM w0.3: VR1.1 36.83,19.05 36.83,20.32 C1.1 40.64,24.13 48.26,24.13 49.53,22.86 U1.2 49.53,17.78 50.8,16.51 U1.6
N03657: length 8.2
  BOTTOM w0.3: U1.5 52.07,12.7 52.7,12.06 54.61,12.06 55.88,13.33 C2.1
N03771: length 94.1
  BOTTOM w0.3: U8.13 19.15,57.25 19.15,55.4 19.91,54.64 26.37,54.64 26.6,54.41 26.6,45.79 v1(30.48,41.91) ; U9.3 105.18,44.22 59.46,44.22 57.15,41.91 v1(43.18,41.91)
N13764: length 31
  BOTTOM w0.3: C5.1 71.12,11.43 69.85,12.7 69.85,21.59 U10.3 64.77,25.4 63.6,26.57 57.05,26.57 R19.2
N13778: length 19.8
  BOTTOM w0.3: U10.5 U10.6 67.21,16.61 67.21,12.6 66.04,11.43 C5.2 63.5,7.62 R20.2
N13892: length 12.3
  BOTTOM w0.3: U10.1 C4.1 R19.1
N13899: length 62
  BOTTOM w0.3: C4.2 R20.1 63.5,22.86 U10.4 68.58,20.32 68.58,7.62 69.75,6.45 73.13,6.45 78.11,11.43 78.11,21.33 80.9,24.13 87.63,24.13 U11.14
N14066: length 16.8
  BOTTOM w0.3: U9.8 119.38,52.07 118.01,50.7 118.01,46.88 117.48,46.35 113.67,46.35 U9.4
N14070: length 37.5
  BOTTOM w0.3: U13.9 114.3,35.56 121.92,43.18 121.92,55.77 120.09,57.6 116.02,57.6 U9.10
N14098: length 13.3
  BOTTOM w0.3: U10.8 76.83,18.41 76.83,20.95 U11.3
N14122: length 41.7
  BOTTOM w0.3: U12.13 100.95,19.67 100.95,12.04 98.43,9.53 88.9,9.53 85.09,13.34 85.09,19.05 U11.4
N14134: length 28.9
  BOTTOM w0.3: U11.10 93.98,10.16 97.79,10.16 100.39,12.76 100.39,21.65 U12.14
N14146: length 31.2
  BOTTOM w0.3: U12.15 99.69,23.5 99.69,13.33 97.18,10.82 95.86,10.82 U11.11
N14213: length 41.6
  BOTTOM w0.3: 77.66,37.27 79.75,37.27 87.72,29.31 91.34,29.31 95.25,25.4 U12.3 ; 77.66,37.27 75.56,39.37 R21.2 ; 77.66,37.27 76.64,36.26 76.64,29.76 74.83,27.94 U10.13
N14272: length 6
  BOTTOM w0.3: U10.10 72.83,21.14 72.83,21.14 72.49,21.49 72.49,24.23 72.83,24.57 72.83,24.57 U10.12
N14287: length 79.2
  BOTTOM w0.3: R22.2 110.94,41.47 71.94,41.47 70.48,40.01 70.48,38.73 71.12,38.1 74.3,38.1 75.56,36.83 75.56,30.25 74.53,29.21 72.69,29.21 72.69,29.21 72.39,29.21 71.12,27.94 71.12,20.32 72.39,19.05 72.39,19.05 U10.9 75.56,19.68 75.56,20.95 U10.11
N14409: length 12.8
  BOTTOM w0.3: Q1.3 124.46,46.99 124.46,43.18 R22.1
N14422: length 5.1
  BOTTOM w0.3: Q1.1 Q2.3

## Copper pours and planes (outline as drawn; the poured copper is in the pictures)
GND on BOTTOM: 0,0 0,100 160,100 160,0 ; 88 cut-outs

## Text on the board
Ref Des/Silkscreen Bottom: KJY
PLACE_BOUND_TOP: FIGURE | SIZE | 0.91 | 0.914 | 1.473 | 3.0 | DRILL CHART: TOP to BOTTOM | ALL UNITS ARE IN MILLIMETERS | PLATED | NON-PLATED | QTY | 23 | 263 | 1 | 4
